# Altium PCB AE_Circuit.PcbDoc
Units mil, origin at the board's own origin, x right, y up, seen from the top; angles counter-clockwise.
Board outline 590.55 x 590.55 mil, 2 copper layers (Top Layer, Bottom Layer), stack 12.8 mil thick; 8 components, 9 nets, 26 pads, 26 vias.
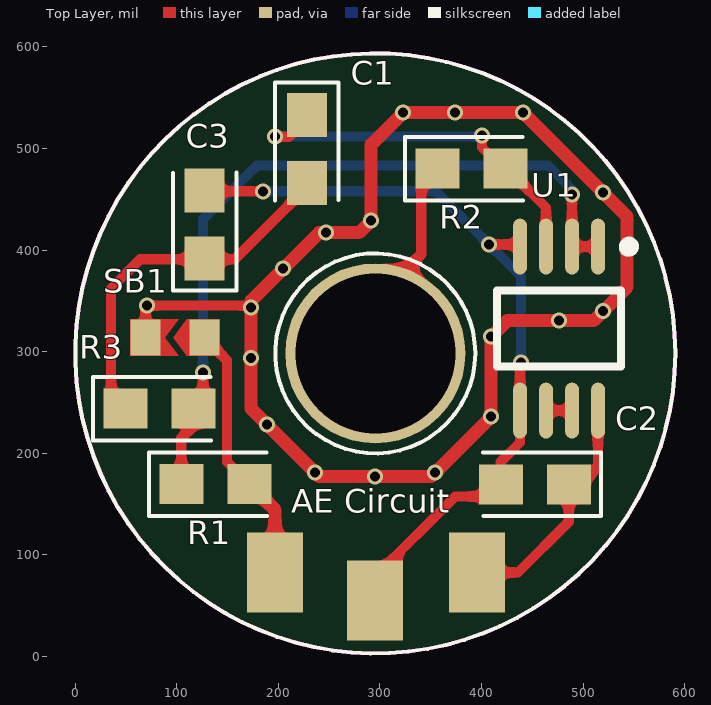
[diagram p0: Top Layer view]
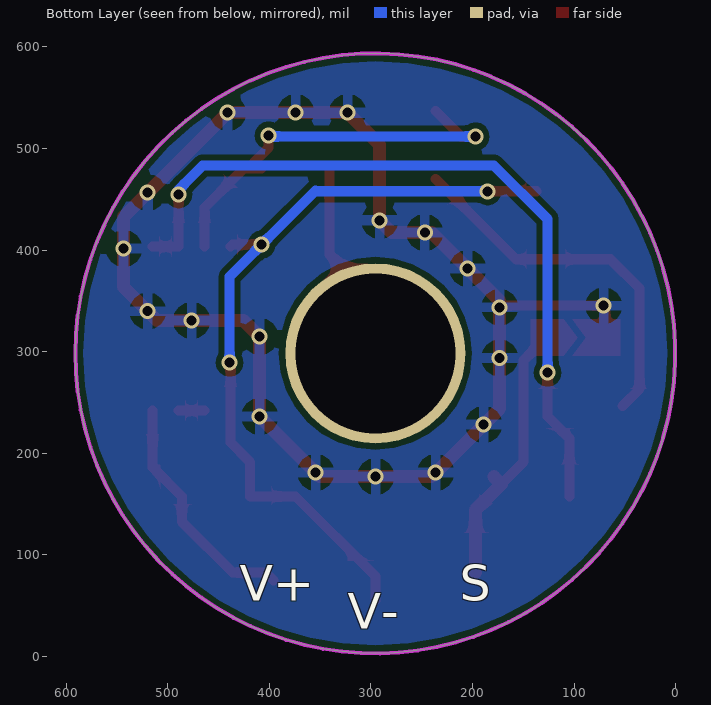
[diagram p1: Bottom Layer view, seen from below]

## Layer stack, top to bottom
Top Solder: solder mask 0.4, Solder Resist, Dk 3.5
Top Layer: signal copper 1.4
Dielectric 1: core 10, FR-4, Dk 4.2
Bottom Layer: signal copper 1.4
Bottom Solder: solder mask 0.4, Solder Resist, Dk 3.5

## Board outline
0.28,298.48 ccw(c295.56,298.48) 295.56,3.21 ccw(c295.56,298.48) 590.83,298.48 ccw(c295.56,298.48) 295.56,593.76 ccw(c295.56,298.48)

## Design rules (kind name [scope] priority, off if disabled: settings)
Clearance [InPolygon] p1: gap=5.91 ignorepadtopadclearanceinfootprint=FALSE except(0: Arc-Hole Track-Hole SMDPad-Hole THPad-Hole Via-Hole Fill-Hole Poly-Hole Region-Hole Text-Hole)
HoleSize [All] p1: absolutevalues=TRUE maxlimit=196.85 minlimit=1 maxpercent=80.000 minpercent=20.000
MinimumSolderMaskSliver [All] p1: minsoldermaskwidth=1
NetAntennae [All] p1: netantennaetolerance=787.4
PlaneConnect [All] p1: planeconnectstyle=Relief reliefexpansion=10 reliefentries=4 reliefconductorwidth=10 reliefairgap=10
PolygonConnect [All] p1: connectstyle=Relief reliefconductorwidth=10 reliefentries=4 polygonreliefangle="90 Angle" airgapwidth=10
RoutingVias [All] p1: holewidth=11.81 width=19.68 viastyle="Through Hole" minholewidth=9.84 minwidth=15.75 maxholewidth=7874.02 maxwidth=7874.02
SilkToSilkClearance [All] p1: silktosilkclearance=0
SilkToSolderMaskClearance [IsPad] p1: minsilkscreentomaskgap=0 clearancetoexposedcopper=TRUE
SolderMaskExpansion [All] p1: expansion=4
Width [All] p1: maxlimit=13 minlimit=3.94 preferedwidth=10
24 further rules are at their usual default settings.

## Components (designator, comment, footprint, x,y, rotation, side; value= is the part's Value field where it differs from the comment)
C1 "100pF" SMD0603-1608 228.35,500 r270 top
C2 "10nF" SMD0603-1608 452.76,169.29 r180 top
C3 "100pF" SMD0603-1608 127.44,425.2 r90 top
R1 "100R" SMD0603-1608 137.8,169.62 r0 top value=1K
R2 "200K" SMD0603-1608 389.76,480.31 r0 top value=1K
R3 "10K" SMD0603-1608 82.68,244.09 r0 top value=1K
SB1 "Solder Jumper" SJB_2_0603 98.43,313.94 r180 top
U1 "TSZ122" "TSOP8 (miniSO8)" 476.38,322.83 r270 top value=Value

## Footprints (in the part's own frame and the unit in brackets; to place one, negate y for a bottom-side part, rotate by r counter-clockwise, add the part's x,y. Pads: shape width x height; smd on the part's side, far side on the other; paste and mask are expansions set on the pad)
SJB_2_0603 [mm] "Solder Jumper Bridge (Size:0603)"
  rect 0.75x0.9 smd: 1(-0.737,0) 2(0.737,0)
  Top Layer region: -1.118,0.457 -1.118,-0.457 -0.292,-0.457 0.05,0 -0.292,0.457
  Top Layer region: 1.118,0.457 -0.089,0.457 0.254,0 -0.089,-0.457 1.118,-0.457
SMD0603-1608 [mm] "Capacitor Chip 0603 package"
  rect 1.1x1 smd: 1(-0.843,0.001) 2(0.857,0.001)
  silkscreen extent -1.65,-0.8 1.3,0.79, body extent -0.71,-0.43 0.71,0.43, height 0.81
"TSOP8 (miniSO8)" [mm] "TSOP, 8-Leads, Body 3x3mm, Pitch 0.65mm, IPC High Density"
  oval 1.4x0.35 smd: 1(-2.05,0.975) 2(-2.05,0.325) 3(-2.05,-0.325) 4(-2.05,-0.975) 5(2.05,-0.975) 6(2.05,-0.325) 7(2.05,0.325) 8(2.05,0.975)
  silkscreen extent -2.17,-1.55 0.95,1.88, body extent -2.35,-1.5 2.35,1.5, height 1.5

## Part data
C1 C2 C3: library part Capacitor, "Capacitor", Volt=16V, AEMS Code=2100341, ComponentLink1Description="Digikey Part Link", ComponentLink2Description="Open Datasheet", ComponentLink2URL=H:\LIBRARY\LIBRARY.Datasheet\, Published=13-April-2009, Publisher="Hoang Nguyen", Vendor=Digikey
R1 R2 R3: library part "Resistor SMD", "Resistor SMD"
SB1: library part SJB_SMD_2_0603
U1: "TSZ122-Dual precision amplifier", Manufacturer="Texas Instruments", Manufacturer_Part_Number=opa2333_dgk_8, PACKAGE_DESIGNATOR=DGK, Datasheet_URL=http://www.ti.com/lit/gpn/OPA2333, FAMILY_NAME="LOW OFFSET VOLTAGE", GENERIC_PART_NUMBER=OPA2333, INDUSTRY_STD_PKG_TYPE=MSOP, PIN_COUNT=8, RefDes=RefDes, Type=Type, Vendor="Texas Instruments"

## Free pads (board coordinates)
  rect 55.12x78.74 smd: 0(196.85,82.68) 0(295.28,55.12) 0(395.67,82.68)
  round 177.17 hole 157.48: 1(295.55,298.46)

## Via types
v1: diameter 15.75, hole 9.84, Top Layer to Bottom Layer, tented both sides, 26 vias

## Nets (pads, with @x,y where several pads share a name; then routed paths per layer and width w, separated by ;. In a path a pad name is that pad's centre, name@x,y a point inside that pad or via, vN(x,y) a via of type N, cw(c..) or ccw(c..) an arc to the next point about the centre after c; other vN are vias at no path point)
2.5V: C2.1 pad.0@395.67,82.68 U1.8 | length 235.7
  Top Layer w10: pad.0@395.67,74.8 403.54,82.68 436.02,82.68 485.95,132.61 485.95,157.48 514.76,186.29 U1.8
-2.5V: C2.2 C3.2 pad.0@295.28,55.12 U1.4 U1.5 | length 773.7
  Top Layer w10: C3.2@136.76,457.94 v1(185.04,457.94) ; pad.0@295.28,55.12 295.28,78.74 374.07,157.54 419.02,157.54 C2.2 419.02,191.66 437.99,210.63 U1.5 437.99,288.39 v1(438.98,289.37) ; v1(407.48,405.51) 436.02,405.51 U1.4
  Bottom Layer w10: v1(185.04,457.94) 353.61,457.94 354.33,458.66 v1(407.48,405.51) 438.98,374.02 v1(438.98,289.37)
BOT_SHIELD: SB1.2 | length 1365
  Top Layer w10: SB1.2 69.41,343.98 v1(70.87,345.43) 171.57,345.43 v1(173.23,343.77)
  Top Layer w13: 173.23,244.09 v1(188.98,228.35) 240.16,177.17 v1(295.28,177.17) 350.39,177.17 v1(354.33,181.1) v1(409.45,236.22) v1(409.45,314.96) 425.2,330.71 v1(476.38,330.71) 510.35,330.71 v1(519.69,340.04) 543.31,363.66 v1(543.31,401.57) 543.31,433.07 v1(519.69,456.69) v1(440.94,535.43) v1(374.02,535.43) v1(322.83,535.43) 291.34,503.94 v1(291.34,429.13) 279.53,417.32 v1(246.78,417.32) 240.16,417.32 v1(204.72,381.89) 173.23,350.39 v1(173.23,343.77) v1(173.23,293.93) 173.23,244.09
  other v1: 236.22,181.1
Buffered_EEG_Signal: pad.0@196.85,82.68 R1.2 SB1.1 | length 270.3
  Top Layer w10: SB1.1 149.61,291.77 149.61,191.6 R1.2
  Top Layer w13: R1.2@178.81,176.96 R1.2 196.85,144.35 pad.0@196.85,82.68
NetC1_1: C1.1 R2.2 U1.3 | length 406.2
  Top Layer w10: v1(196.85,511.81) 197.12,511.54 210.68,511.54 C1.1@236.28,537.13 ; v1(400.59,512.8) 400.59,500.98 414.48,487.1 407.75,480.37 425.14,480.37 463.58,441.93 U1.3
  Bottom Layer w10: v1(196.85,511.81) 397.64,511.81 398.62,510.83 v1(400.59,512.8)
NetC1_2: C1.2 C3.1 R3.1 | length 367.9
  Top Layer w10: R3.1@52.07,246.74 35.43,263.39 35.43,362.2 64.24,391.02 157.09,391.02 C1.2@236.28,470.2
NetR1_1: R1.1 R3.2 U1.1 U1.2 | length 758.3
  Top Layer w10: R1.1@104.6,157.54 R1.1 104.6,214.83 125.98,236.22 v1(125.98,279.53) ; v1(489.17,454.99) U1.2 U1.1
  Bottom Layer w10: v1(125.98,279.53) 125.98,430.39 178.87,483.27 465.55,483.27 489.17,459.65 v1(489.17,454.99)
NetU1_6: U1.6 U1.7 | length 25.6
  Top Layer w10: U1.6 U1.7
Signal_In: pad.1 R2.1 | length 200.7
  Top Layer w10: pad.1 311.02,313.94 311.02,366.14 340.82,395.94 R2.1@340.82,480.37

## Polygon pours and split planes (outlines as drawn)
BOT_SHIELD on Bottom Layer "Bottom Layer-BOT_SHIELD" (solid, remove dead copper, pour order 13): -52.17,555.12 32.48,639.76 505.91,639.76 651.57,494.09 651.57,36.42 564.96,-50.2 70.87,-50.2 -59.06,79.72 -59.06,547.24
no net on Bottom Layer "Bottom Layer-No Net" (solid, remove dead copper, pour order 11): -37.4,609.25
no net on Bottom Layer "Bottom Layer-No Net 1" (solid, remove dead copper, pour order 9): -62.99,641.73

## Keep-outs
Top Overlay:
  circle w3.94: c295.56,298.48 r295.28
Keep-Out Layer:
  circle w3.94: c295.56,298.48 r295.28

## Silkscreen, mask and mechanical layers (free items; w line width, h text height)
Top Overlay:
  circle w3.94: c295.56,298.48 r98.43
  text "AE Circuit" at 212.6,133.86 h40
Bottom Overlay:
  text "S" at 212.6,43.31 h60
  text "V+" at 429.13,43.31 h60
  text "V-" at 322.83,15.75 h60
Top Solder:
  lines w20: 173.23,244.09 240.16,177.17 350.39,177.17 409.45,236.22 409.45,314.96 425.2,330.71 510.35,330.71 543.31,363.66 543.31,433.07 440.94,535.43 322.83,535.43 291.34,503.94 291.34,429.13 279.53,417.32 240.16,417.32 173.23,350.39 173.23,244.09
Drill Drawing:
  circle w3.94: c295.56,298.48 r295.28